# Altium PCB MosaicBus.PcbDoc
Units mm, origin at the board's own origin, x right, y up, seen from the top; angles counter-clockwise.
Board outline 35.56 x 72.52 mm, 4 copper layers (L1 (Signal), L2 (GND), L3 (GND), L4 (Signal)), stack 1.211 mm thick; 36 components, 36 nets, 372 pads, 169 vias.
Unrouted connection lines stored in the file: 1.
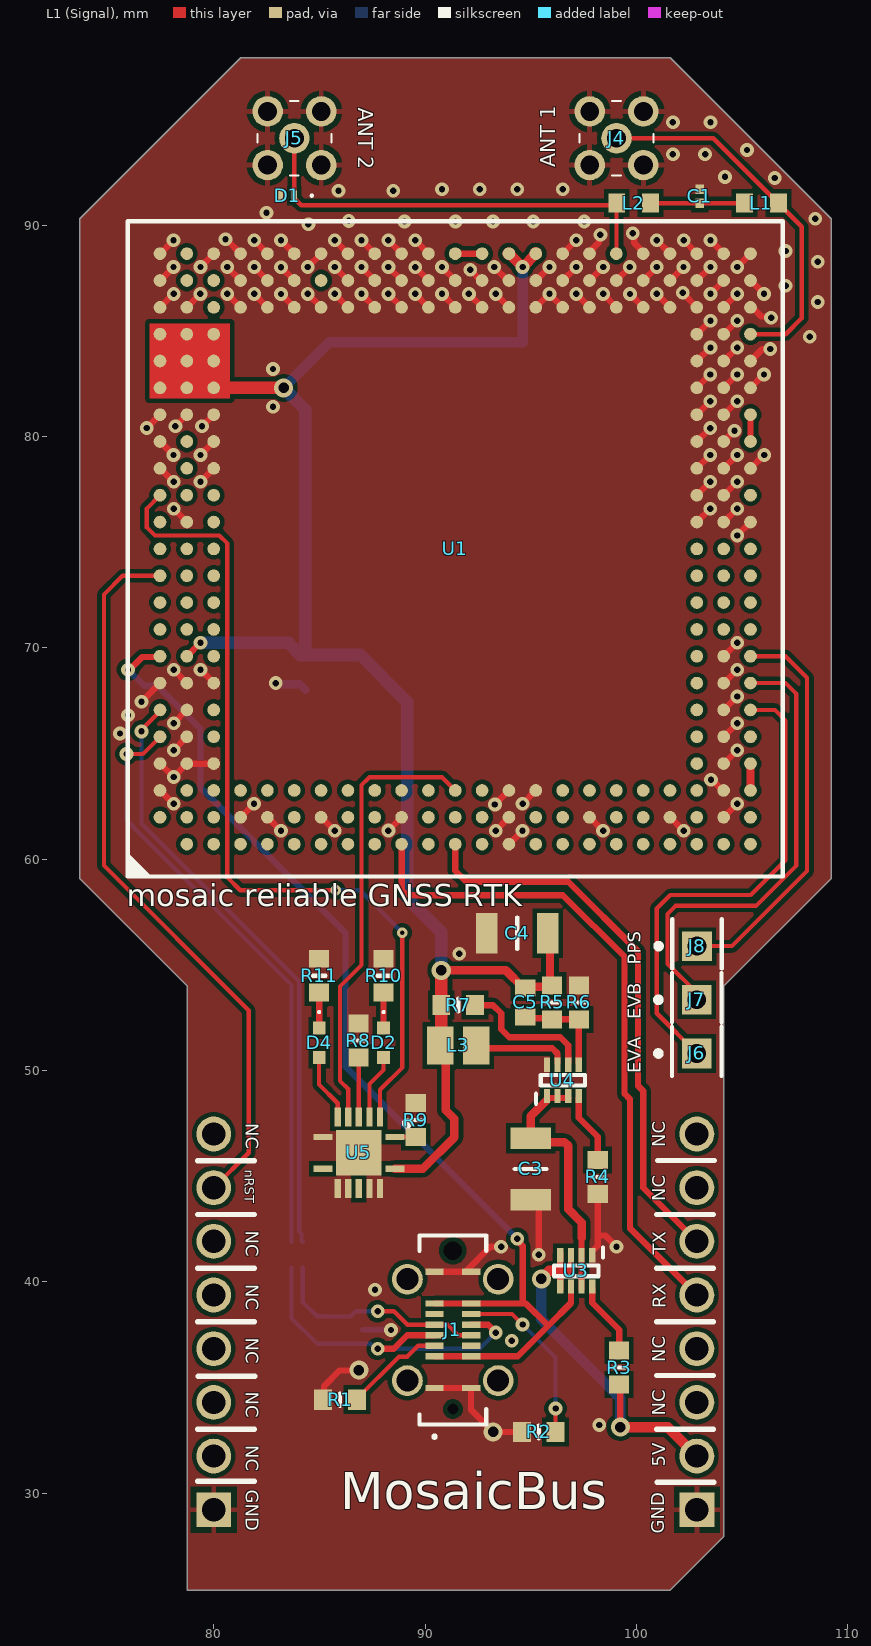
[diagram p0: L1 (Signal) view]
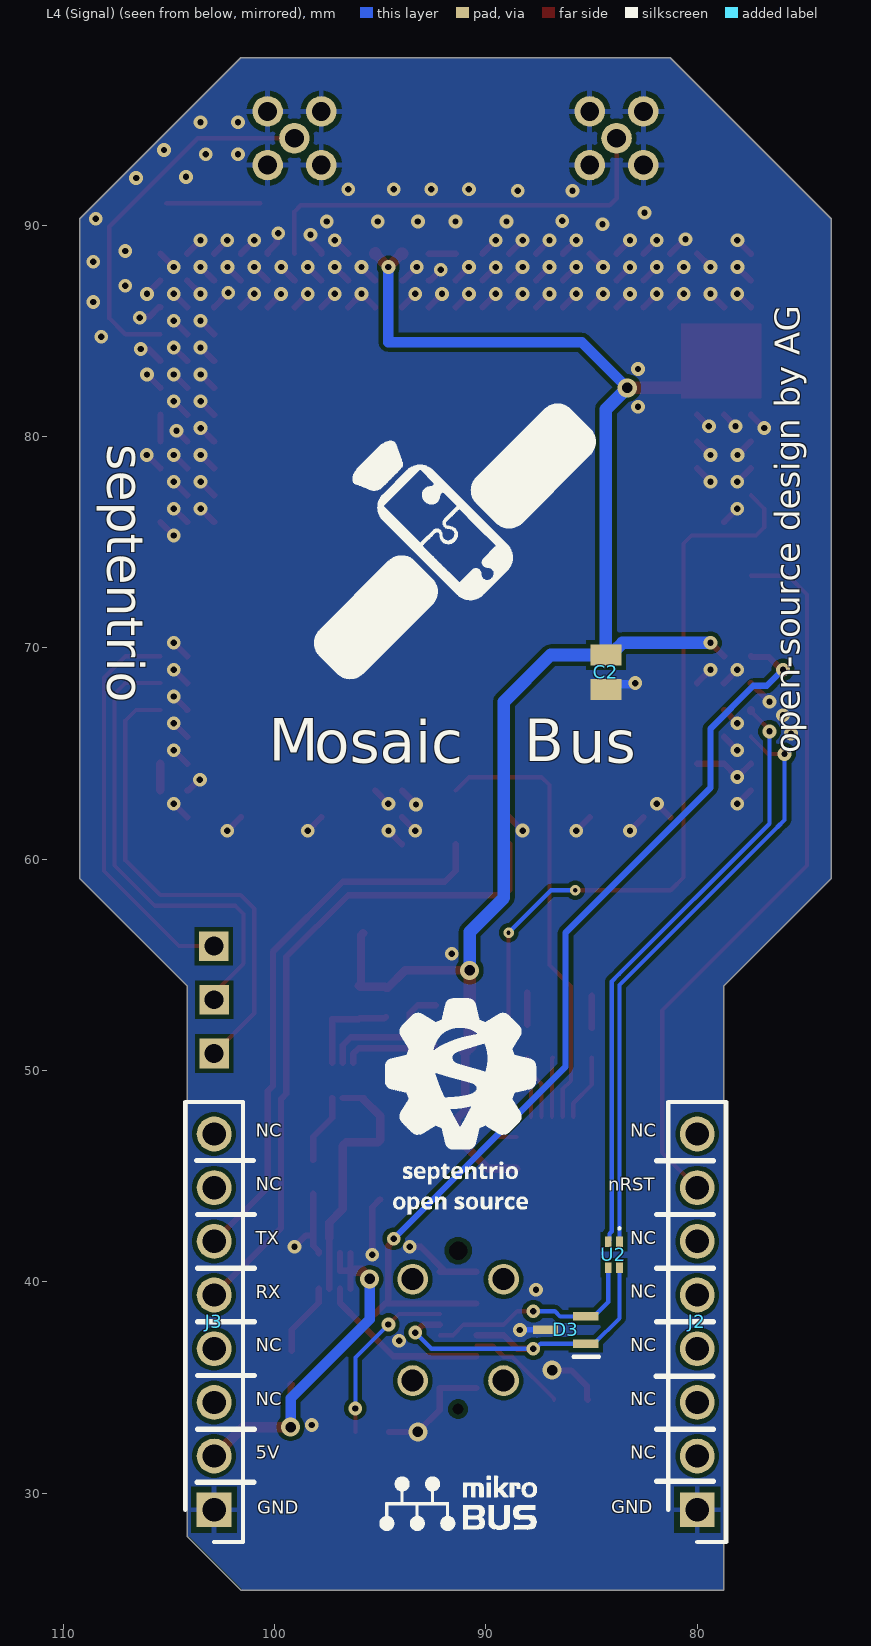
[diagram p1: L4 (Signal) view, seen from below]
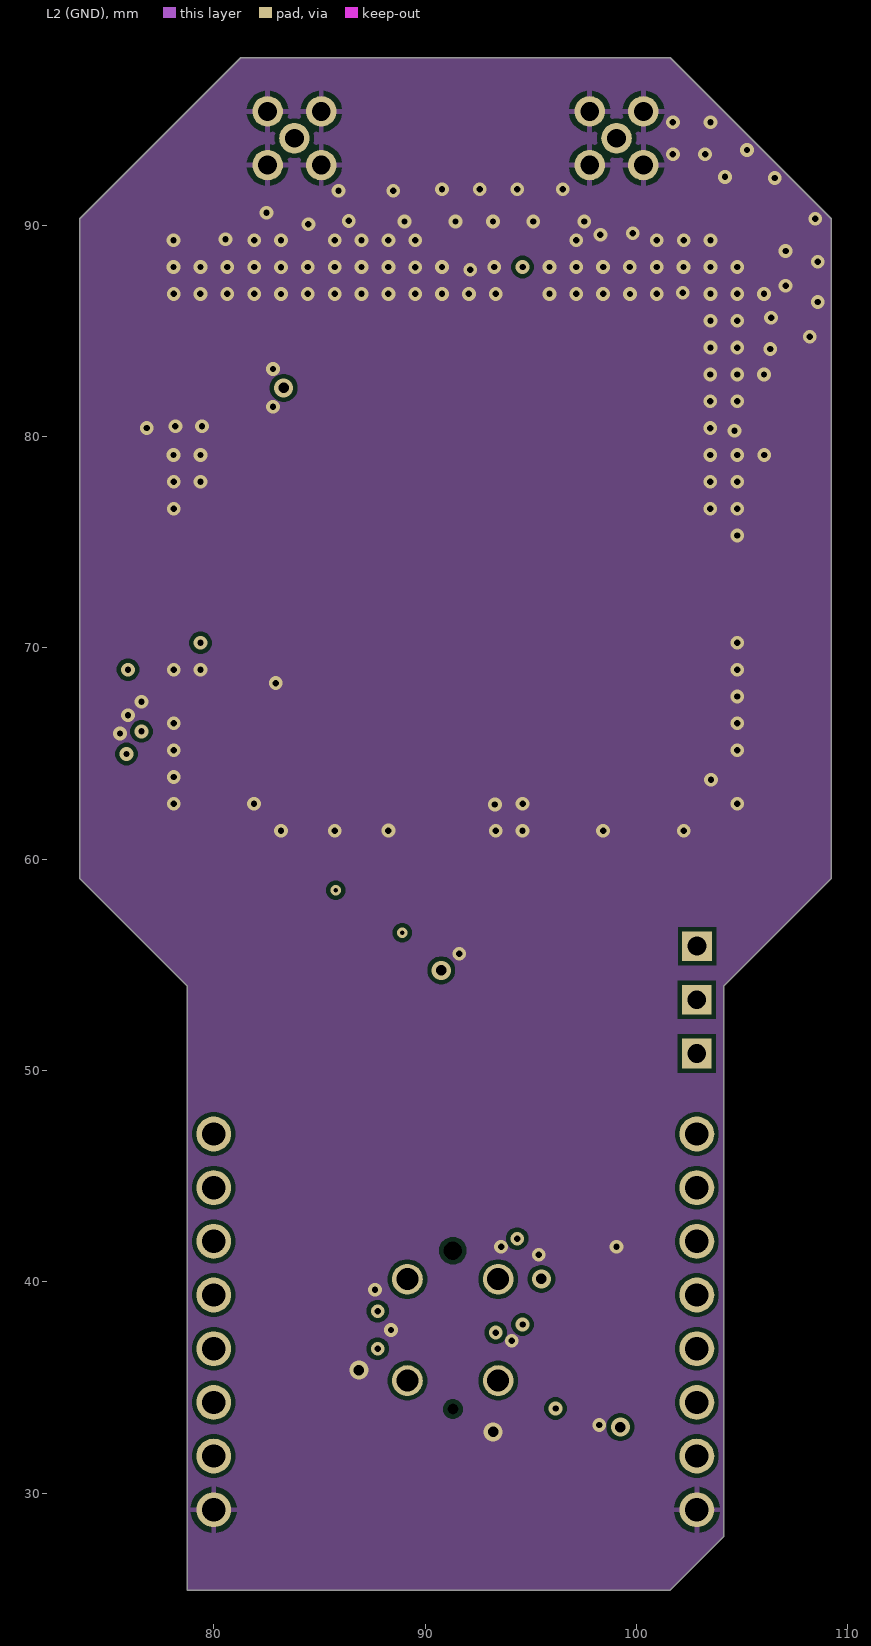
[diagram p2: L2 (GND)]
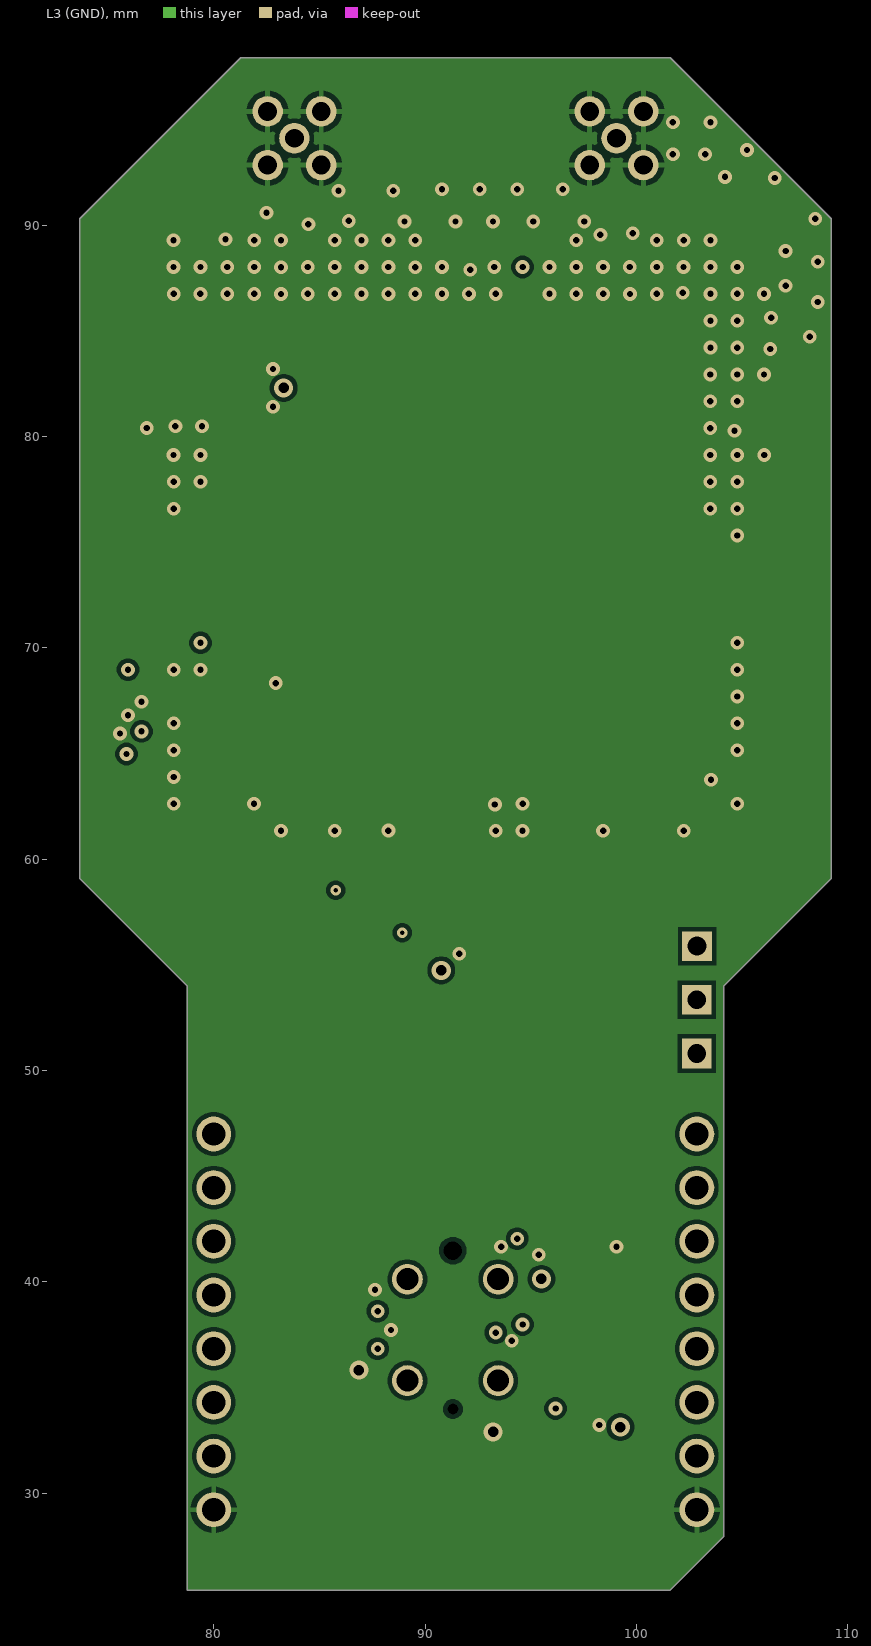
[diagram p3: L3 (GND)]
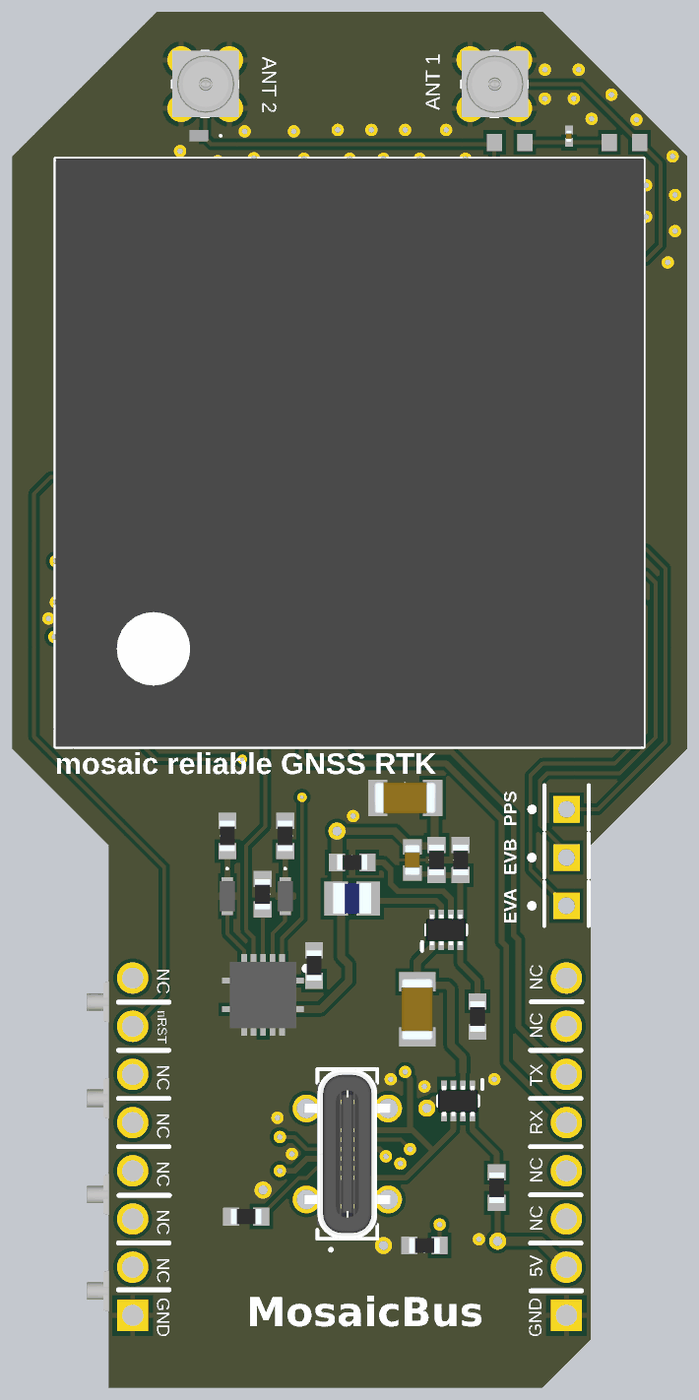
[diagram p4: 3D render of the assembled board from above, using the file's embedded part models]
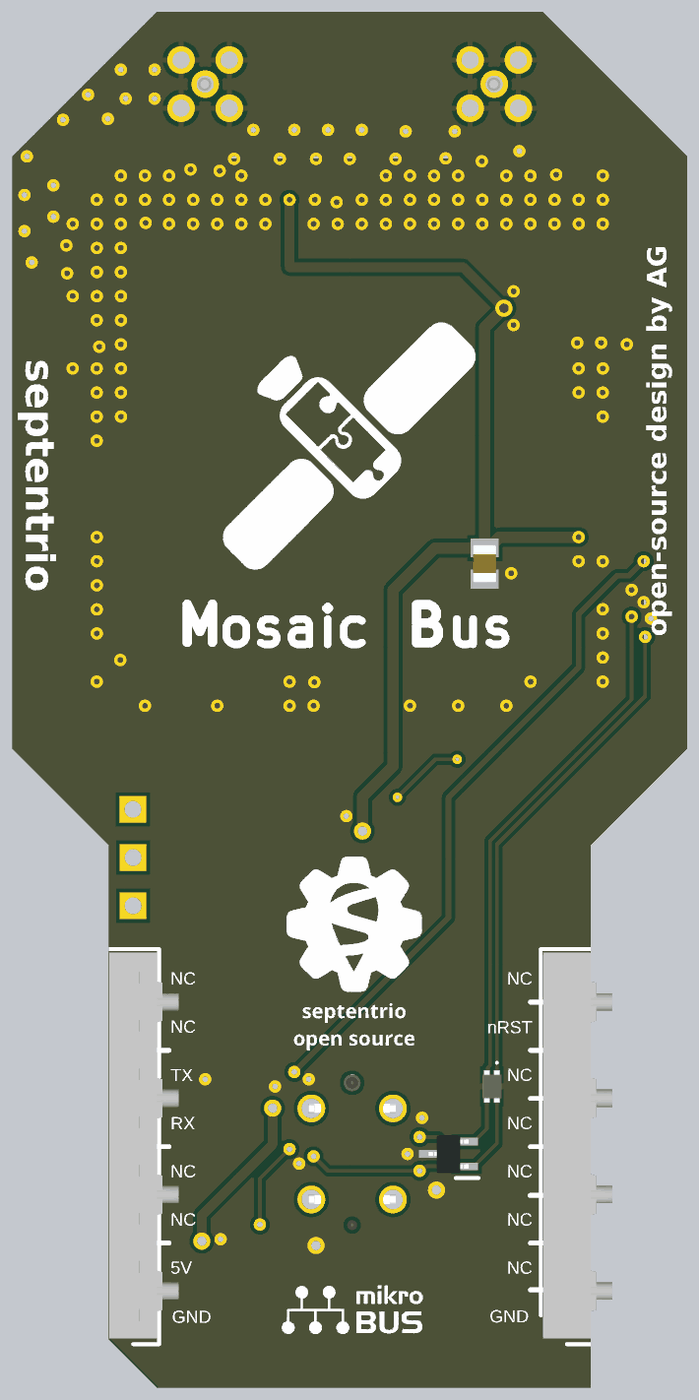
[diagram p5: 3D render of the assembled board from below, using the file's embedded part models]

## Layer stack, top to bottom
Top Solder: solder mask 0.0254, SM-001, Dk 4
L1 (Signal): signal copper 0.035
Dielectric 1: prepreg 0.18, PP-017, Dk 4.3
L2 (GND): signal copper 0.035
Dielectric 3: core 0.7112, Core-039, Dk 4.8
L3 (GND): signal copper 0.035
Dielectric 5: prepreg 0.18, PP-017, Dk 4.3
L4 (Signal): signal copper 0.035
Bottom Solder: solder mask 0.0254, SM-001, Dk 4

## Board outline
78.74,25.4 78.74,54 73.66,59.08 73.66,90.297 81.28,97.917 101.6,97.917 109.22,90.297 109.22,59.08 104.14,54 104.14,27.94 104.13,27.94 101.59,25.4

## Design rules (kind name [scope] priority, off if disabled: settings)
Clearance [All] p1: gap=0.2 ignorepadtopadclearanceinfootprint=TRUE except(0.15: Arc-Arc Arc-Track Track-Track)
ComponentClearance [All] p1 off: gap=0.254 collisioncheckmode=3 verticalgap=0.254 showdistances=TRUE donotcheckwithout3dbody=TRUE checkcomponentboundary=TRUE
DiffPairsRouting [All] p1: maxlimit=0.4 minlimit=0.2 mostfreqgap=0.3 toplayer_minwidth=0.2 toplayer_maxwidth=0.4 toplayer_prefwidth=0.3 midlayer1_minwidth=0.2 midlayer1_maxwidth=0.4 midlayer1_prefwidth=0.3 midlayer2_minwidth=0.2 midlayer2_maxwidth=0.4 midlayer2_prefwidth=0.3 bottomlayer_minwidth=0.2 bottomlayer_maxwidth=0.4 bottomlayer_prefwidth=0.3 maxuncoupledlength=12.7
Height [All] p1 off: minheight=0 maxheight=25.4 prefheight=2
HoleSize [All] p1: absolutevalues=TRUE maxlimit=2 minlimit=0.25 maxpercent=80.000 minpercent=20.000
HoleToHoleClearance [All] p1: gap=0.35 allowstackedmicrovias=TRUE
MinimumSolderMaskSliver [All] p1: minsoldermaskwidth=0.08
PlaneClearance [All] p1: clearance=0.3
PlaneConnect [All] p1: planeconnectstyle=Direct reliefexpansion=0.508 reliefentries=4 reliefconductorwidth=0.254 reliefairgap=0.254
PolygonConnect [All] p1: thpad.connectstyle=Relief thpad.reliefconductorwidth=0.254 thpad.reliefentries=4 thpad.polygonreliefangle="90 Angle" thpad.airgapwidth=0.254 smdpad.connectstyle=Direct smdpad.reliefconductorwidth=0.254 smdpad.reliefentries=4 smdpad.polygonreliefangle="90 Angle" smdpad.airgapwidth=0.254 via.connectstyle=Direct via.reliefconductorwidth=0.254 via.reliefentries=4 via.polygonreliefangle="90 Angle" via.airgapwidth=0.254
RoutingVias "RoutingVias <= 0.45mm" [(ObjectKind = 'Via') And (HoleDiameter <= AsMM(0.45))] p1: holewidth=0.3 width=0.65 viastyle="Through Hole" minholewidth=0.25 minwidth=0.6 maxholewidth=0.45 maxwidth=0.8
RoutingVias "RoutingVias > 0.45mm" [(ObjectKind = 'Via') And (HoleDiameter > AsMM(0.45))] p2: holewidth=0.5 width=0.85 viastyle="Through Hole" minholewidth=0.5 minwidth=0.85 maxholewidth=0.9 maxwidth=1.25
SilkToSilkClearance [All] p1: silktosilkclearance=0.2
SilkToSolderMaskClearance [IsPad] p1: minsilkscreentomaskgap=0.2 clearancetoexposedcopper=TRUE
SolderMaskExpansion [All] p1: expansion=0 istentingtop=FALSE
UnRoutedNet [All] p1: checkbadconnections=TRUE
Width [All] p1: maxlimit=1.5 minlimit=0.15 preferedwidth=0.3
Width Width_Ant [All] p2: maxlimit=0.329 minlimit=0.329 preferedwidth=0.209 impedanceprofiledriven=TRUE impedanceprofileid={CD74243C-5134-4139-B155-4422ED206F6A} impedanceprofilevalue=50.000000 minimp=50.000000 maximp=50.000000 favimp=50.000000
19 further rules are at their usual default settings.

## Classes and differential pairs
component class Mosaic-Bus: C1 C2 D1 D2 D4 J4 J5 J6 J7 J8 L1 L2 R8 R9 R10 R11 U1 U5
component class Power-Connectors: B1 B2 B3 B4 C3 C4 C5 D3 J1 J2 J3 L3 R1 R2 R3 R4 R5 R6 R7 U2 U3 U4 X1 X2 X3 X4 X5 X6 X7
differential pair USB_DEV: +USB_DEV_P -USB_DEV_N

## Components (designator, comment, footprint, x,y, rotation, side; value= is the part's Value field where it differs from the comment)
C1 "100pF" CAPC0603X35N 102.997,91.364 r270 top
C2 "22uF" CAPC2012X145N 84.328,68.834 r270 bottom
C3 "22uF" CAPC3317X190N 94.996,45.339 r90 top
C4 "22uF" CAPC3317X190N 94.361,56.49 r180 top
C5 "10pF" CAPC1608X95N 94.742,53.213 r90 top
D1 "TPD1E0B04DPYR" TPD1E0B04DPYR 83.49,91.389 r180 top
D2 "Amber" 155060AS75300 88.036,51.308 r270 top
D3 "TPD2E2U06QDCKRQ1" TPD2E2U06QDCKRQ1 86.233,37.719 r0 bottom
D4 "Amber" 155060AS75300 84.988,51.308 r270 top
J1 "USB412003C" USB412003C 91.313,37.719 r90 top
J2 "Left" HDRV8W63P0X254_1X8_2032X254X970P 80,29.21 r90 bottom locked
J3 "Right" HDRV8W63P0X254_1X8_2032X254X970P 102.86,29.21 r90 bottom locked
J4 "ANT 1" MMCX-734151472 99.06,94.107 r0 top
J5 "ANT 2" MMCX-734151472 83.82,94.107 r0 top
J6 "EVA" TECO-5-146280-2_V 102.86,52.07 r90 top
J7 "EVB" TECO-5-146280-2_V 102.86,54.61 r90 top
J8 "PPS" TECO-5-146280-2_V 102.87,57.15 r90 top
L1 "39nH" 744786139A 105.918,91.034 r0 top
L2 "39nH" 744786139A 99.873,91.034 r0 top
L3 "470nH" INDC2016X100N 91.567,51.181 r0 top
R1 "5.1k" RESC1608X60N 85.979,34.417 r180 top
R2 "5.1k" RESC1608X60N 95.377,32.893 r180 top
R3 "10k" RESC1608X60N 99.187,35.941 r270 top
R4 "10k" RESC1608X60N 98.171,44.958 r270 top
R5 "100k" RESC1608X60N 96.012,53.213 r90 top
R6 "22k" RESC1608X60N 97.282,53.213 r270 top
R7 "100k" RESC1608X60N 91.567,53.086 r180 top
R8 "10k" RESC1608X60N 86.843,51.41 r90 top
R9 "10k" RESC1608X60N 89.56,47.65 r90 top
R10 "330R" RESC1608X60N 88.036,54.483 r90 top
R11 "330R" RESC1608X60N 84.988,54.483 r270 top
U1 "mosaic reliable GNSS RTK" Mosaic-x5 91.43,74.676 r90 top
U2 "KCZ1210AH900HRTD25" KCZ1210AH900HRTD25 83.947,41.275 r0 bottom
U3 "TPS2116DRLR" SOTFL50P160X60-8N 97.155,40.513 r270 top
U4 "TPS628501DRLR" SOTFL50P160X60-8N 96.52,49.53 r90 top
U5 "SN74LVTH125RGYR" QFN50P350X350X100-15N-D 86.868,46.101 r180 top

## Footprints (in the part's own frame and the unit in brackets; to place one, negate y for a bottom-side part, rotate by r counter-clockwise, add the part's x,y. Pads: shape width x height; smd on the part's side, far side on the other; paste and mask are expansions set on the pad)
155060AS75300 [mm]
  rect 0.6x0.6 smd: 1(-0.7,0) 2(0.7,0)
  silkscreen extent -1.5,-0.05 -1.4,0.05, body extent -0.8,-0.4 0.8,0.4, height 1.28
744786139A [mm] "RF Inductor 1.4GHz"
  rect 0.8x0.9 smd: 1(0.8,0) 2(-0.8,0)
CAPC0603X35N [mm]
  rect 0.46x0.42 smd: 1(-0.33,0) 2(0.33,0)
  body extent -0.3,-0.15 0.3,0.15, height 0.35
CAPC1608X95N [mm]
  rect 0.81x0.99 smd: 1(-0.69,0) 2(0.69,0)
  body extent -0.81,-0.41 0.81,0.41, height 0.95
CAPC2012X145N [mm]
  rect 0.99x1.47 smd: 1(-0.82,0) 2(0.82,0)
  body extent -1,-0.63 1,0.63, height 0.7
CAPC3317X190N [mm]
  rect 1.02x1.92 smd: 1(-1.45,0) 2(1.45,0)
  silkscreen extent 0,-0.75 0,0.75, body extent -1.65,-0.85 1.65,0.85, height 1.9
HDRV8W63P0X254_1X8_2032X254X970P [mm]
  rect 1.65x1.65 / inner round 1.65 / far side rect 1.65x1.65 hole 1.1: 1(0,0)
  round 1.65 hole 1.1: 2(2.54,0) 3(5.08,0) 4(7.62,0) 5(10.16,0) 6(12.7,0) 7(15.24,0) 8(17.78,0)
  silkscreen extent -1.52,-1.37 19.3,1.37, body extent -1.2,-2.4 19.12,1.25, height 9.5
INDC2016X100N [mm]
  rect 1.25x1.8 smd: 1(-0.85,0) 2(0.85,0)
  body extent -1,-0.8 1,0.8, height 1
KCZ1210AH900HRTD25 [mm]
  rect 0.325x0.5 smd: 1(-0.263,-0.612) 2(0.262,-0.612) 3(0.262,0.612) 4(-0.263,0.612)
  silkscreen extent -0.31,-1.3 -0.21,-1.2, body extent -0.5,-0.83 0.5,0.83, height 0.7
MMCX-734151472 [mm] "MMCX Connector"
  round 1.446 hole 0.89: 1(0,0) 2(-1.27,1.27) 3(-1.27,-1.27) 4(1.27,-1.27) 5(1.27,1.27)
  silkscreen extent -1.76,-1.76 1.76,1.76, body extent -1.73,-1.75 1.78,1.75, height 4.42
Mosaic-x5 [mm]
  round 0.6 smd: A2(-12.7,13.97) A3(-11.43,13.97) A4(-10.16,13.97) A5(-8.89,13.97) A6(-7.62,13.97) A7(-6.35,13.97) A8(-5.08,13.97) A9(-3.81,13.97) A10(-2.54,13.97) A11(-1.27,13.97) A12(0,13.97) A13(1.27,13.97) A14(2.54,13.97) A15(3.81,13.97) A16(5.08,13.97) A17(6.35,13.97) A18(7.62,13.97) A19(8.89,13.97) A20(10.16,13.97) A21(11.43,13.97) A22(12.7,13.97) A23(13.97,13.97) AA1(-13.97,-11.43) AA2(-12.7,-11.43) AA3(-11.43,-11.43) AA4(-10.16,-11.43) AA5(-8.89,-11.43) AA6(-7.62,-11.43) AA7(-6.35,-11.43) AA8(-5.08,-11.43) AA9(-3.81,-11.43) AA10(-2.54,-11.43) AA11(-1.27,-11.43) AA12(0,-11.43) AA13(1.27,-11.43) AA14(2.54,-11.43) AA15(3.81,-11.43) AA16(5.08,-11.43) AA17(6.35,-11.43) AA18(7.62,-11.43) AA19(8.89,-11.43) AA20(10.16,-11.43) AA21(11.43,-11.43) AA22(12.7,-11.43) AA23(13.97,-11.43) AB1(-13.97,-12.7) AB2(-12.7,-12.7) AB3(-11.43,-12.7) AB4(-10.16,-12.7) AB5(-8.89,-12.7) AB6(-7.62,-12.7) AB7(-6.35,-12.7) AB8(-5.08,-12.7) AB9(-3.81,-12.7) AB10(-2.54,-12.7) AB11(-1.27,-12.7) AB12(0,-12.7) AB13(1.27,-12.7) AB14(2.54,-12.7) AB15(3.81,-12.7) AB16(5.08,-12.7) AB17(6.35,-12.7) AB18(7.62,-12.7) AB19(8.89,-12.7) AB20(10.16,-12.7) AB21(11.43,-12.7) AB22(12.7,-12.7) AB23(13.97,-12.7) AC1(-13.97,-13.97) AC2(-12.7,-13.97) AC3(-11.43,-13.97) AC4(-10.16,-13.97) AC5(-8.89,-13.97) AC6(-7.62,-13.97) AC7(-6.35,-13.97) AC8(-5.08,-13.97) AC9(-3.81,-13.97) AC10(-2.54,-13.97) AC11(-1.27,-13.97) AC12(0,-13.97) AC13(1.27,-13.97) AC14(2.54,-13.97) AC15(3.81,-13.97) AC16(5.08,-13.97) AC17(6.35,-13.97) AC18(7.62,-13.97) AC19(8.89,-13.97) AC20(10.16,-13.97) AC21(11.43,-13.97) AC22(12.7,-13.97) AC23(13.97,-13.97) B1(-13.97,12.7) B2(-12.7,12.7) B3(-11.43,12.7) B4(-10.16,12.7) B5(-8.89,12.7) B6(-7.62,12.7) B7(-6.35,12.7) B8(-5.08,12.7) B9(-3.81,12.7) B10(-2.54,12.7) B11(-1.27,12.7) B12(0,12.7) B13(1.27,12.7) B14(2.54,12.7) B15(3.81,12.7) B16(5.08,12.7) B17(6.35,12.7) B18(7.62,12.7) B19(8.89,12.7) B20(10.16,12.7) B21(11.43,12.7) B22(12.7,12.7) B23(13.97,12.7) C1(-13.97,11.43) C2(-12.7,11.43) C3(-11.43,11.43) C4(-10.16,11.43) C5(-8.89,11.43) C6(-7.62,11.43) C7(-6.35,11.43) C8(-5.08,11.43) C9(-3.81,11.43) C10(-2.54,11.43) C11(-1.27,11.43) C12(0,11.43) C13(1.27,11.43) C14(2.54,11.43) C15(3.81,11.43) C16(5.08,11.43) C17(6.35,11.43) C18(7.62,11.43) C19(8.89,11.43) C20(10.16,11.43) C21(11.43,11.43) C22(12.7,11.43) C23(13.97,11.43) D1(-13.97,10.16) D2(-12.7,10.16) D3(-11.43,10.16) D21(11.43,10.16) D22(12.7,10.16) D23(13.97,10.16) E1(-13.97,8.89) E2(-12.7,8.89) E3(-11.43,8.89) E21(11.43,8.89) E22(12.7,8.89) E23(13.97,8.89) F1(-13.97,7.62) F2(-12.7,7.62) F3(-11.43,7.62) F21(11.43,7.62) F22(12.7,7.62) F23(13.97,7.62) G1(-13.97,6.35) G2(-12.7,6.35) G3(-11.43,6.35) G21(11.43,6.35) G22(12.7,6.35) G23(13.97,6.35) H1(-13.97,5.08) H2(-12.7,5.08) H3(-11.43,5.08) H21(11.43,5.08) H22(12.7,5.08) H23(13.97,5.08) J1(-13.97,3.81) J2(-12.7,3.81) J3(-11.43,3.81) J21(11.43,3.81) J22(12.7,3.81) J23(13.97,3.81) K1(-13.97,2.54) K2(-12.7,2.54) K3(-11.43,2.54) K21(11.43,2.54) K22(12.7,2.54) K23(13.97,2.54) L1(-13.97,1.27) L2(-12.7,1.27) L3(-11.43,1.27) L21(11.43,1.27) L22(12.7,1.27) L23(13.97,1.27) M1(-13.97,0) M2(-12.7,0) M3(-11.43,0) M21(11.43,0) M22(12.7,0) M23(13.97,0) N1(-13.97,-1.27) N2(-12.7,-1.27) N3(-11.43,-1.27) N21(11.43,-1.27) N22(12.7,-1.27) N23(13.97,-1.27) P1(-13.97,-2.54) P2(-12.7,-2.54) P3(-11.43,-2.54) P21(11.43,-2.54) P22(12.7,-2.54) P23(13.97,-2.54) R1(-13.97,-3.81) R2(-12.7,-3.81) R3(-11.43,-3.81) R21(11.43,-3.81) R22(12.7,-3.81) R23(13.97,-3.81) T1(-13.97,-5.08) T2(-12.7,-5.08) T3(-11.43,-5.08) T21(11.43,-5.08) T22(12.7,-5.08) T23(13.97,-5.08) U1(-13.97,-6.35) U2(-12.7,-6.35) U3(-11.43,-6.35) U21(11.43,-6.35) U22(12.7,-6.35) U23(13.97,-6.35) V1(-13.97,-7.62) V2(-12.7,-7.62) V3(-11.43,-7.62) V21(11.43,-7.62) V22(12.7,-7.62) V23(13.97,-7.62) W1(-13.97,-8.89) W2(-12.7,-8.89) W3(-11.43,-8.89) W21(11.43,-8.89) W22(12.7,-8.89) W23(13.97,-8.89) Y1(-13.97,-10.16) Y2(-12.7,-10.16) Y3(-11.43,-10.16) Y21(11.43,-10.16) Y22(12.7,-10.16) Y23(13.97,-10.16)
  silkscreen extent -15.5,-15.5 15.5,15.5, body extent -15.5,-15.5 15.5,15.5, height 4.5
QFN50P350X350X100-15N-D [mm]
  rect 0.9x0.3 smd: 1(-1.7,-0.75) 7(1.7,-0.75) 8(1.7,0.75) 14(-1.7,0.75)
  rect 0.3x0.9 smd: 2(-1,-1.7) 3(-0.5,-1.7) 4(0,-1.7) 5(0.5,-1.7) 6(1,-1.7) 9(1,1.7) 10(0.5,1.7) 11(0,1.7) 12(-0.5,1.7) 13(-1,1.7)
  rect 2.15x2.15 smd: 15(0,0)
  silkscreen extent -2.41,-1.52 -2.16,-1.27, body extent -1.75,-1.75 1.75,1.75, height 0.97
RESC1608X60N [mm]
  rect 0.85x0.95 smd: 1(-0.8,0) 2(0.8,0)
  silkscreen extent 0,-0.3 0,0.3, body extent -0.8,-0.4 0.8,0.4, height 0.6
SOTFL50P160X60-8N [mm]
  rect 0.67x0.3 smd: 1(-0.74,0.75) 2(-0.74,0.25) 3(-0.74,-0.25) 4(-0.74,-0.75) 5(0.74,-0.75) 6(0.74,-0.25) 7(0.74,0.25) 8(0.74,0.75)
  silkscreen extent -1.11,-1.05 0.25,1.27, body extent -0.8,-1.05 0.8,1.05, height 0.6
TECO-5-146280-2_V [mm] "Connector, 2-Leads, Body 4.67x2.34mm, Pitch 2.54mm"
  rect 1.4x1.4 hole 0.89: 1(-1.27,0)
  silkscreen extent -2.33,-1.17 0,1.94
TPD1E0B04DPYR [mm] "TVS Diode Bidirectional 1-Channel"
  rect 0.25x0.5 smd: 1(-0.325,0) 2(0.325,0)
  silkscreen extent -1.2,-0.05 -1.1,0.05, body extent -0.5,-0.3 0.5,0.3, height 0.45
TPD2E2U06QDCKRQ1 [mm] "TVS Diode Unidirectional 2-Channel"
  rect 1.2x0.4 smd: 1(-0.95,0.65) 2(-0.95,-0.65) 3(0.95,0)
  silkscreen extent -1.58,1.27 -0.38,1.27, body extent -1.05,-1 1.05,1, height 1
USB412003C [mm] "USB-C Connector 16P Vertical"
  rect 0.3x0.87 smd: A1(-2.75,0.865) A4(-1.25,0.865) A5(-0.75,0.865) A6(-0.25,0.865) A7(0.25,0.865) A8(0.75,0.865) A9(1.25,0.865) A12(2.75,0.865) B1(2.75,-0.865) B4(1.25,-0.865) B5(0.75,-0.865) B6(0.25,-0.865) B7(-0.25,-0.865) B8(-0.75,-0.865) B9(-1.25,-0.865) B12(-2.75,-0.865)
  round 1.46 hole 1.04: MH1(-2.4,2.15) MH2(2.4,2.15) MH3(2.4,-2.15) MH4(-2.4,-2.15)
  round 0.26 hole 0.52 unplated: MH5(-3.75,0)
  round 0.445 hole 0.89 unplated: MH6(3.75,0)
  silkscreen extent -5.1,-1.58 4.47,1.58, body extent -4.47,-2.3 4.47,2.3, height 6.5

## Part data
C1: library part CMP-013-000003-3, "100pF Capacitor", Dielectric=C0G, Manufacturer=Walsin, Tolerance=5%, VoltageRating=25V, Capacitance=100pF, SIZE=0603
C2: library part CMP-013-000005-3, "22uF Capacitor", Capacitance=22µF, Dielectric=X5R, Manufacturer=Walsin, Tolerance=10%, VoltageRating=6.3V, SIZE=2012
C3 C4: library part CMP-00015-2, "22uF Capacitor", Capacitance=22µF, Dielectric=X5R, Manufacturer=Walsin, Tolerance=10%, VoltageRating=16V, SIZE=3216
C5: library part CMP-00005-3, "10pF Capacitor", Dielectric=C0G, Manufacturer=Walsin, Tolerance=1%, VoltageRating=100V, Capacitance=10pF, SIZE=1608
D1: library part CMP-019-000007-3, "TVS Diode Bidirectional 1-Channel", Manufacturer="Texas Instruments", Type="TVS Diode"
D2 D4: library part CMP-00011-4, "Amber LED", ForwardCurrent=2A, ForwardVoltage=20mV, Manufacturer="Wurth Elektronik", Color=Amber, SIZE=1608
D3: library part CMP-019-000005-5, "TVS Diode Unidirectional 2-Channel", Manufacturer="Texas Instruments", Type="TVS Diode"
J1: library part CMP-002-000001-6, "USB-C Connector 16P Vertical", Manufacturer="Global Connector Technology", Type=USB
J2 J3: library part CMP-007-000003-3, "Headers & Wire Housings 8P SINGLE ROW"
J4 J5: library part CMP-007-000002-4, "MMCX Connector", Manufacturer=Molex
J6 J7 J8: library part CMP-00010-1, "Through hole pin"
L1 L2: library part CMP-00001-4, "39nH Inductor", Frequency=1.4GHz, Manufacturer="Wurth Elektronik", Tolerance=5%, Inductance=39nH, Shielding=Shielded, SIZE=1608
L3: library part CMP-00006-6, "470nH Inductor", Frequency=175MHz, Manufacturer="Wurth Elektronik", Tolerance=30%, Inductance=470nH, Shielding=Shielded, SIZE=2016
R1 R2: library part CMP-052-000000-4, "5.1kOhm Resistor", Manufacturer=Walsin, PowerRating=100mW, Tolerance=1%, VoltageRating=50V, Resistance=5.1k, SIZE=1608
R3 R4 R8 R9: library part CMP-052-000001-5, "10kOhm Resistor", Manufacturer=Walsin, PowerRating=100mW, Tolerance=5%, VoltageRating=50V, Resistance=10k, SIZE=1608
R5 R7: library part CMP-00007-4, "100kOhm Resistor", Manufacturer=Walsin, PowerRating=100mW, Tolerance=5%, VoltageRating=50V, Resistance=100k, SIZE=1608
R6: library part CMP-00008-4, "22kOhm Resistor", Manufacturer=Walsin, PowerRating=100mW, Tolerance=5%, VoltageRating=50V, Resistance=22k, SIZE=1608
R10 R11: library part CMP-00017-2, "330Ohm Resistor", Manufacturer=Walsin, PowerRating=100mW, Resistance=330, Tolerance=5%, VoltageRating=50V, SIZE=1608
U1: library part CP-Mosaic-x5-7, "Septentrio Mosaic x5"
U2: library part CMP-016-000001-3, "Common Mode Filters / Chokes,"
U3: library part CMP-00007-4, "Power Multiplexer", Case=SOT-5X3-8, Manufacturer="Texas Instruments", Type="Power Multiplexer"
U4: library part CMP-00008-4, "Switching Voltage Regulators", Case=SOT-583-8, Manufacturer="Texas Instruments", Topology=Buck, Type="Switching Voltage Regulator"
U5: library part CMP-00009-5, "3-State Output Driver", Case=VQFN-14, Manufacturer="Texas Instruments", Output Current=64mA, Supply Voltage=3.3V, Inputs=4, Outputs=3

## Via types
v1: diameter 0.65, hole 0.3, L1 (Signal) to L4 (Signal), 161 vias
v2: diameter 0.9, hole 0.5, L1 (Signal) to L4 (Signal), 6 vias
v3: diameter 0.5, hole 0.2, L1 (Signal) to L4 (Signal), 2 vias

## Nets (pads, with @x,y where several pads share a name; then routed paths per layer and width w, separated by ;. In a path a pad name is that pad's centre, name@x,y a point inside that pad or via, vN(x,y) a via of type N, cw(c..) or ccw(c..) an arc to the next point about the centre after c; other vN are vias at no path point)
1V8: U1.AC3 U1.AC4 | length 1.3
  L1 (Signal) w0.4: U1.AC3 U1.AC4
3.3V: C2.1 C4.1 C5.2 L3.1 R5.2 R7.2 U1.A18 U1.A19 U1.A20 U1.B8 U1.B18 U1.B19 U1.B20 U1.C18 U1.C19 U1.C20 U1.P23 U1.R23 U5.14 | length 78.5
  L1 (Signal) w0.3: U1.B8 78.735,69.596 79.37,70.231 v1(79.375,70.231)
  L1 (Signal) w0.4: U5.14 89.903,45.351 91.389,46.838 91.389,47.703 90.983,48.109 L3.1@90.983,50.915 ; v2(90.767,54.737) 93.818,54.737 94.652,53.903 C5.2 94.797,53.958 95.957,53.958 R5.2 95.911,54.114 95.911,56.389 C4.1
  L1 (Signal) w0.5: U1.P23@93.98,88.646 v1(94.615,88.011) U1.R23@95.24,88.636
  L1 (Signal) w0.6: 80.518,82.296 v2(83.312,82.296) ; v2(90.767,54.737) R7.2 90.767,51.231 L3.1 L3.1@90.983,50.915 ; U1.P23 U1.P23@93.98,88.646 ; U1.R23@95.24,88.636 U1.R23 U1.R23@95.24,88.656
  L4 (Signal) w0.5: v2(83.312,82.296) 85.471,84.455 94.615,84.455 v1(94.615,88.011)
  L4 (Signal) w0.6: v1(79.375,70.231) 83.542,70.231 83.893,69.88 83.893,69.849 84.088,69.654 C2.1 ; v2(83.312,82.296) 84.328,81.28 C2.1 ; v2(90.767,54.737) 90.767,56.553 89.154,58.166 89.154,67.437 86.937,69.654 C2.1
5V_IN: J3.2 R3.2 U3.3 U3.4 U3.5 | length 18.8
  L1 (Signal) w0.3: U3.5@96.405,39.675 96.405,40.513 ; U3.4@96.405,41.351 96.405,40.513 ; U3.3@96.905,41.351 96.905,40.664 96.901,40.659 96.901,40.513 96.405,40.513 ; R3.2 R3.2@99.237,35.141 ; v2(99.238,33.122) R3.2@99.238,35.04
  L1 (Signal) w0.5: v2(95.504,40.132) 95.885,40.513 96.405,40.513 ; v2(99.238,33.122) 101.488,33.122 J3.2
  L4 (Signal) w0.5: v2(95.504,40.132) 95.504,38.227 99.238,34.493 v2(99.238,33.122)
5V_OUT: C3.2 U3.2 U3.7 U4.1 U4.2 U4.3 | length 12.2
  L1 (Signal) w0.3: U4.1@95.77,48.605 95.77,48.692 96.27,48.692 U4.3@96.77,48.692 ; U3.7@97.405,39.675 97.405,41.351 97.405,42.084
  L1 (Signal) w0.4: U4.1@95.77,48.605 94.996,47.831 94.996,46.709 95.096,46.609 96.598,46.609 96.774,46.433 96.774,43.434 97.405,42.803 97.405,42.084
GND: C1.1 C2.2 C3.1 C4.2 D1.2 D3.3 J1.A1 J1.A12 J1.B1 J1.B12 J2.1 J3.1 J4.2 J4.3 J4.4 J4.5 J5.2 J5.3 J5.4 J5.5 R1.2 R2.2 R4.2 R6.1 R8.2 R9.2 R10.2 R11.1 U1.A3 U1.A4 U1.A7 U1.A15 U1.A16 U1.A17 U1.A21 U1.A22 U1.A23 U1.AA13 U1.AA14 U1.AA15 U1.AA16 U1.AA17 U1.AA18 U1.AA19 U1.AA20 U1.AA21 U1.AA22 U1.AA23 U1.AB2 U1.AB3 U1.AB4 U1.AB5 U1.AB6 U1.AB7 U1.AB8 U1.AB13 U1.AB14 U1.AB15 U1.AB16 U1.AB17 U1.AB18 U1.AB19 U1.AB20 U1.AB21 U1.AB22 U1.AB23 U1.AC13 U1.AC15 U1.AC18 U1.AC19 U1.AC21 U1.AC22 U1.AC23 U1.B4 U1.B5 U1.B6 U1.B7 U1.B13 U1.B17 U1.B21 U1.C4 U1.C7 U1.C15 U1.C16 U1.C17 U1.C23 U1.D2 U1.D21 U1.D22 U1.D23 U1.E2 U1.E21 U1.E22 U1.E23 U1.F21 U1.F22 U1.F23 U1.G2 U1.G21 U1.G23 U1.H21 U1.H22 U1.H23 U1.J21 U1.J22 U1.J23 U1.K2 U1.K21 U1.K22 U1.K23 U1.L21 U1.L22 U1.L23 U1.M21 U1.M22 U1.N21 U1.N22 U1.P1 U1.P2 U1.P3 U1.P21 U1.P22 U1.R3 U1.R21 U1.R22 U1.T21 U1.T22 U1.T23 U1.U2 U1.U21 U1.U22 U1.U23 U1.V21 U1.V22 U1.W21 U1.W22 U1.W23 U1.Y2 U1.Y21 U1.Y22 U1.Y23 U3.1 U4.8 U5.7 U5.9 U5.10 U5.12 U5.13 U5.15 | length 124.7
  L1 (Signal) w0.2: U1.A15 U1.A15@77.47,78.486 ; U1.B17@78.73,81.016 U1.B17 ; U1.C15 U1.C15@80,78.496 ; U1.C16@80,79.746 U1.C16
  L1 (Signal) w0.3: v1@76.581,67.437 v1(76.581,67.447) U1.A7 U1.A7@77.47,68.326 ; v1@76.835,80.391 v1(76.835,80.396) 77.46,81.021 U1.A17 ; U1.A3 77.465,63.246 78.1,62.611 v1(78.105,62.611) ; U1.A4 77.47,64.516 v1(78.105,63.881) 78.73,64.506 U1.B4 U1.C4 ; U1.A16 v1(78.095,79.121) ; U1.A21 77.465,86.106 78.1,86.741 v1(78.105,86.741) ; U1.A22 77.465,87.376 v1(78.1,88.011) v1@78.105,88.011 ; U1.A23 77.465,88.646 v1(78.1,89.281) v1@78.105,89.281 ; U1.A15@77.47,78.486 77.47,78.481 78.1,77.851 v1(78.105,77.851) ; v1(78.105,65.151) 78.73,65.776 U1.B5 ; v1@78.105,66.421 v1(78.105,66.431) U1.B6 ; v1@78.105,68.961 v1(78.105,68.956) 78.73,68.331 U1.B7 U1.B7@78.74,68.326 ; v1(78.105,76.581) 78.73,75.956 U1.B13 ; v1(78.188,80.474) U1.B17@78.73,81.016 ; U1.B21 78.735,86.106 v1(79.37,86.741) v1@79.375,86.741 ; v1(79.375,68.961) 80,68.336 U1.C7 ; v1@79.375,77.851 v1(79.375,77.856) 80,78.481 U1.C15 ; v1(79.375,79.121) U1.C16@80,79.746 ; v1(79.375,88.011) 79.375,88.016 80,88.641 U1.C23 ; v1(79.448,80.474) U1.C17 ; v1(80.645,86.741) 80.645,86.736 81.27,86.111 U1.D21 ; v1(80.645,88.011) 80.645,88.006 81.27,87.381 U1.D22 ; v1@80.645,89.281 80.645,89.276 81.27,88.651 U1.D23 ; U1.D2 81.275,61.976 v1(81.91,62.611) v1@81.915,62.611 ; v1(81.915,86.741) 81.915,86.736 82.54,86.111 U1.E21 ; v1(81.915,88.011) 81.915,88.006 82.54,87.381 U1.E22 ; v1@81.915,89.281 v1(81.915,89.276) 82.54,88.651 U1.E23 ; U1.E2 82.545,61.976 83.18,61.341 v1(83.185,61.341) ; v1@83.185,86.741 v1(83.185,86.736) 83.81,86.111 U1.F21 ; v1@83.185,88.011 v1(83.185,88.006) 83.81,87.381 U1.F22 ; v1@83.185,89.281 v1(83.185,89.276) 83.81,88.651 U1.F23 ; v1(84.455,86.741) 84.455,86.736 85.08,86.111 U1.G21 ; v1@84.455,88.011 84.455,88.016 85.08,88.641 U1.G23 ; U1.G2 85.085,61.976 v1@85.72,61.341 ; R1.2 85.217,34.455 85.217,35.052 85.968,35.803 86.857,35.803 v2(86.868,35.814) ; v1(85.725,86.741) 85.725,86.736 86.35,86.111 U1.H21 ; v1(85.725,88.011) 85.725,88.006 86.35,87.381 U1.H22 ; v1(85.725,89.281) 85.725,89.276 86.35,88.651 U1.H23 ; v1(86.995,86.741) 86.995,86.736 87.62,86.111 U1.J21 ; v1(86.995,88.011) 86.995,88.006 87.62,87.381 U1.J22 ; v1@86.995,89.281 v1(86.995,89.276) 87.62,88.651 U1.J23 ; v1@88.265,61.341 v1(88.265,61.346) 88.89,61.971 U1.K2 ; v1(88.265,86.741) 88.265,86.736 88.89,86.111 U1.K21 ; v1(88.265,88.011) 88.265,88.006 88.89,87.381 U1.K22 ; v1(88.265,89.281) 88.265,89.276 88.89,88.651 U1.K23 ; v1(89.535,86.741) 89.535,86.736 90.16,86.111 U1.L21 ; v1@89.535,88.011 v1(89.535,88.006) 90.16,87.381 U1.L22 ; v1(89.535,89.281) 89.535,89.276 90.16,88.651 U1.L23 ; J1.A1 J1.B12 92.178,33.933 v2(93.218,32.893) R2.2 ; J1.A12 J1.B1 ; v1(90.805,86.741) 90.805,86.736 91.43,86.111 U1.M21 ; v1(90.805,88.011) 90.805,88.006 91.43,87.381 U1.M22 ; J1.B1@91.962,40.527 93.091,41.656 v1(93.599,41.656) ; v1(92.075,86.741) 92.075,86.736 92.7,86.111 U1.N21 ; v1(92.134,87.884) 92.642,87.376 U1.N22 ; v1(93.277,88.011) 93.912,87.376 U1.P22 ; v1(93.305,62.584) 93.307,62.584 93.968,63.246 U1.P3 ; v1(93.345,61.341) 93.345,61.346 93.97,61.971 U1.P2 ; v1(93.345,86.741) 93.345,86.736 93.97,86.111 U1.P21 ; U1.P1 93.975,60.706 v1(94.61,61.341) ; v1(94.615,62.611) 94.615,62.616 95.24,63.241 U1.R3 ; C3.1 95.017,43.889 95.377,43.529 v1(95.377,41.275) ; U1.R21 95.245,86.106 95.88,86.741 v1(95.885,86.741) ; U1.R22 95.25,87.376 v1(95.885,88.011) ; v1@95.885,86.736 96.51,86.111 U1.T21 ; U1.T22 96.515,87.376 97.15,88.011 v1(97.155,88.011) ; U1.T23 96.515,88.646 97.15,89.281 v1(97.155,89.281) ; v1(97.155,86.741) 97.155,86.736 97.78,86.111 U1.U21 ; U1.U2 97.785,61.976 98.42,61.341 v1(98.425,61.341) ; U1.U22 97.785,87.376 98.42,88.011 v1(98.425,88.011) ; U1.U23 97.78,88.727 98.231,89.178 98.231,89.468 v1(98.298,89.535) ; U3.1@97.905,41.351 97.905,41.438 98.171,41.704 98.171,42.188 ; R4.2 98.171,42.188 ; v1(98.425,86.741) 98.425,86.736 99.05,86.111 U1.V21 ; U1.V22 99.055,87.376 v1(99.69,88.011) v1@99.695,88.011 ; v1(99.06,41.656) 98.528,42.188 98.171,42.188 ; v1@99.695,86.741 99.695,86.736 100.32,86.111 U1.W21 ; v1(99.832,89.611) 99.899,89.544 99.899,89.149 100.32,88.727 U1.W23 ; U1.W22 100.325,87.376 100.96,88.011 v1(100.965,88.011) ; v1(100.965,86.741) 100.965,86.736 101.59,86.111 U1.Y21 U1.Y21@101.595,86.106 ; v1(100.965,89.281) 100.965,89.276 101.59,88.651 U1.Y23 ; U1.Y2 101.595,61.976 102.23,61.341 v1(102.235,61.341) ; U1.Y22 101.595,87.376 v1(102.23,88.011) v1@102.235,88.011 ; v1@102.23,86.741 102.235,86.741 102.235,86.736 102.86,86.111 U1.AA21 U1.AA21@102.865,86.106 ; v1(102.235,89.281) 102.235,89.276 102.86,88.651 U1.AA23 ; U1.AA13 102.865,75.946 v1(103.5,76.581) v1@103.505,76.581 ; U1.AA14 102.865,77.216 v1(103.5,77.851) v1@103.505,77.851 ; U1.AA15 102.865,78.486 v1(103.5,79.121) v1@103.505,79.121 ; U1.AA16 102.865,79.756 v1(103.5,80.391) v1@103.505,80.391 ; U1.AA17 102.865,81.026 v1(103.5,81.661) v1@103.505,81.661 ; U1.AA18 102.865,82.296 v1(103.5,82.931) v1@103.505,82.931 ; U1.AA19 102.865,83.566 103.5,84.201 v1(103.505,84.201) ; U1.AA20 102.865,84.836 103.5,85.471 v1(103.505,85.471) ; U1.AA22 102.865,87.376 103.5,88.011 v1(103.505,88.011) ; v1@103.5,86.741 v1(103.505,86.741) 103.505,86.746 104.13,87.371 U1.AB22 ; v1(103.505,89.281) 103.505,89.276 104.13,88.651 U1.AB23 ; v1(103.534,63.754) 103.578,63.754 104.086,63.246 U1.AB3 ; U1.AB2 104.135,61.976 104.77,62.611 v1(104.775,62.611) ; U1.AB4 104.135,64.516 v1(104.77,65.151) v1@104.775,65.151 ; U1.AB5 104.135,65.786 v1(104.77,66.421) v1@104.775,66.421 ; U1.AB6 104.135,67.056 v1(104.77,67.691) v1@104.775,67.691 ; U1.AB7 104.135,68.326 v1(104.77,68.961) v1@104.775,68.961 ; U1.AB8 104.135,69.596 v1(104.77,70.231) v1@104.775,70.231 ; U1.AB13 104.135,75.946 104.77,76.581 v1(104.775,76.581) ; U1.AB14 104.135,77.216 104.77,77.851 v1(104.775,77.851) ; U1.AB15 104.135,78.486 104.77,79.121 v1(104.775,79.121) ; U1.AB16 104.135,79.756 v1(104.643,80.264) ; U1.AB17 104.135,81.026 104.77,81.661 v1(104.775,81.661) ; U1.AB18 104.135,82.296 v1(104.77,82.931) v1@104.775,82.931 ; U1.AB19 104.135,83.566 v1(104.77,84.201) v1@104.775,84.201 ; U1.AB20 104.135,84.836 v1(104.77,85.471) v1@104.775,85.471 ; U1.AB21 104.135,86.106 v1(104.77,86.741) v1@104.775,86.741 ; v1(104.775,75.311) 104.775,75.316 105.4,75.941 U1.AC13 ; v1@104.775,88.011 v1(104.775,88.016) 105.4,88.641 U1.AC23 ; U1.AC15 105.405,78.486 106.04,79.121 v1(106.045,79.121) ; U1.AC18 105.405,82.296 v1(106.04,82.931) v1@106.045,82.931 ; U1.AC19 105.968,84.134 v1(106.335,84.134) ; U1.AC21 105.481,86.106 105.913,85.675 106.308,85.675 v1(106.375,85.608) ; U1.AC22 105.405,87.376 v1(106.04,86.741) v1@106.045,86.741
  L4 (Signal) w0.254: D3.3@87.056,37.719 v1(88.392,37.719)
  L4 (Signal) w0.4: v1(82.931,68.326) 82.979,68.278 84.064,68.278 C2.2
  other v1: 98.247,33.223 94.107,37.211 87.63,39.624 91.618,55.524 85.725,61.341 75.565,65.938 75.946,66.802 82.804,81.407 82.804,83.185 108.204,84.709 108.585,86.36 99.695,86.739 102.197,86.794 107.061,87.122 84.455,88.014 108.585,88.265 107.061,88.773 80.559,89.332 84.48,90.043 89.027,90.17 91.44,90.17 93.218,90.17 95.123,90.17 97.536,90.17 86.385,90.195 108.458,90.297 82.499,90.576 85.903,91.618 88.494,91.618 90.805,91.694 92.583,91.694 94.361,91.694 96.52,91.694 106.553,92.227 104.191,92.278 101.727,93.345 103.251,93.345 105.232,93.548 101.727,94.869 103.505,94.869
GPLED: U1.A14 U5.2 | length 40.2
  L1 (Signal) w0.2: U1.A14 76.835,76.591 76.835,75.692 77.216,75.311 80.264,75.311 80.645,74.93 80.645,59.131 81.255,58.522 v3(85.776,58.522) ; U5.2 87.868,49.082 88.925,50.14 v3(88.925,56.515)
  L4 (Signal) w0.2: v3(85.776,58.522) 86.919,58.522 v3(88.925,56.515)
GPLED2: U1.M3 U5.5 | length 21.1
  L1 (Signal) w0.2: U5.5 86.368,49.116 85.979,49.505 85.979,53.975 86.995,54.991 86.995,63.5 87.366,63.871 90.805,63.871 U1.M3
NetC1_2: C1.2 L1.2 L2.1 | length 4.4
  L1 (Signal) w0.21: L2.1 C1.2 L1.2
NetC5_1: C5.1 R5.1 R6.2 U4.5 | length 4.6
  L1 (Signal) w0.3: C5.1 94.797,52.468 95.957,52.468 R5.1 R6.2 97.27,52.401 U4.5@97.27,50.368
NetD1_1: D1.1 J5.1 L2.2 U1.V23 | length 20.3
  L1 (Signal) w0.21: J5.1 83.817,94.104 83.817,91.392 D1.1 83.815,91.264 84.147,90.932 98.755,90.932 99.06,90.627 99.06,88.656 U1.V23
NetD2_1: D2.1 R10.1 | length 1.5
  L1 (Signal) w0.3: D2.1@88.036,52.158 R10.1
NetD2_2: D2.2 U5.3 | length 3.1
  L1 (Signal) w0.2: U5.3 87.376,47.809 87.376,49.352 88.036,50.013 D2.2
NetD4_1: D4.1 R11.2 | length 1.5
  L1 (Signal) w0.3: D4.1 R11.2@84.988,53.533
NetD4_2: D4.2 U5.6 | length 3.2
  L1 (Signal) w0.2: D4.2 84.988,49.327 85.868,48.447 U5.6
NetJ1_A5: J1.A5 R1.1 | length 4.8
  L1 (Signal) w0.2: R1.1 86.779,34.467 88.761,36.449 89.154,36.449 89.674,36.969 J1.A5
NetJ1_B5: J1.B5 R2.1 | length 8.4
  L1 (Signal) w0.2: J1.B5 94.119,38.469 v1(94.615,37.973) ; R2.1 v1(96.177,33.998)
  L4 (Signal) w0.2: v1(94.615,37.973) 96.177,36.411 v1(96.177,33.998)
NetJ4_1: J4.1 L1.1 U1.AC20 | length 17.6
  L1 (Signal) w0.21: J4.1 103.632,94.107 107.823,89.916 107.823,85.598 107.061,84.836 U1.AC20
NetJ6_1: J6.1 U1.AC6 | length 23.2
  L1 (Signal) w0.2: J6.1@102.87,50.8 100.965,52.705 100.965,57.658 101.6,58.293 105.41,58.293 107.061,59.944 107.061,66.548 106.553,67.056 U1.AC6
NetJ7_1: J7.1 U1.AC7 | length 21.9
  L1 (Signal) w0.2: J7.1@102.86,53.657 101.473,55.045 101.473,57.404 101.854,57.785 105.664,57.785 107.569,59.69 107.569,67.818 107.061,68.326 U1.AC7
NetJ8_1: J8.1 U1.AC8 | length 18.9
  L1 (Signal) w0.2: J8.1 104.521,55.88 108.077,59.436 108.077,68.58 107.061,69.596 U1.AC8
NetL3_2: L3.2 U4.7 | length 4.4
  L1 (Signal) w0.3: L3.2 92.544,51.054 96.012,51.054 96.27,50.796 U4.7@96.27,50.368
NetR3_1: R3.1 U3.8 | length 3.5
  L1 (Signal) w0.3: U3.8@97.905,39.675 97.905,39.001 99.187,37.719 R3.1
NetR4_1: R4.1 U4.4 | length 3.3
  L1 (Signal) w0.3: U4.4@97.27,48.692 97.27,47.764 98.171,46.863 R4.1
NetR7_1: R7.1 U4.6 | length 6.5
  L1 (Signal) w0.3: R7.1 93.218,53.086 93.599,52.705 93.599,51.943 93.98,51.562 96.393,51.562 96.77,51.185 U4.6@96.77,50.368
NetR8_1: R8.1 U5.4 | length 2.8
  L1 (Signal) w0.2: R8.1 86.868,50.584 U5.4
NetR9_1: R9.1 U5.1 | length 1
  L1 (Signal) w0.2: U5.1 R9.1
NetU1_AC16: U1.AC16 U1.AC17 | length 1.3
  L1 (Signal) w0.3: U1.AC16 U1.AC17
NetU1_M23: U1.M23 U1.N23 | length 1.3
  L1 (Signal) w0.3: U1.M23 U1.N23
nRST: J2.7 U1.A11 | length 34.6
  L1 (Signal) w0.2: U1.A11 75.692,73.406 74.803,72.517 74.803,59.69 81.661,52.832 81.661,46.101 80.01,44.45 J2.7
RXD3: J3.5 U1.K1 | length 31.4
  L1 (Signal) w0.3: U1.K1 88.9,60.696 88.9,58.547 89.154,58.293 96.52,58.293 99.441,55.372 99.441,48.895 99.695,48.641 99.695,42.535 J3.5
TXD3: J3.6 U1.M1 | length 26.4
  L1 (Signal) w0.3: U1.M1 91.43,59.446 91.948,58.928 96.774,58.928 100.076,55.626 100.076,49.276 100.33,49.022 100.33,44.44 J3.6
USB_DEV_N: U1.A6 U2.2 | length 28.7
  L1 (Signal) w0.2: v1@76.581,66.118 U1.A6@77.46,66.997
  L1 (Signal) w0.381: v1(76.581,66.04) v1@76.581,66.118 ; U1.A6@77.46,66.997 U1.A6
  L4 (Signal) w0.2: v1(76.581,66.04) 76.581,61.671 83.718,54.534 83.722,54.534 84.049,54.207 84.049,42.378 84.156,42.271 84.156,41.94 U2.2
USB_DEV_P: U1.A5 U2.1 | length 28.3
  L1 (Signal) w0.2: v1(75.87,64.973) 76.647,64.973 77.455,65.781 77.46,65.781 U1.A5
  L4 (Signal) w0.2: v1(75.87,64.973) 75.87,61.849 76.216,61.502 76.219,61.5 76.219,61.496 83.68,54.035 83.684,54.035 U2.1
USB_DN: D3.2 J1.A7 J1.B7 U2.3 | length 10.6
  L1 (Signal) w0.2: v1@87.884,38.608 88.519,38.608 89.158,37.969 91.063,37.969 91.563,37.469 J1.B7
  L4 (Signal) w0.2: U2.3@84.201,40.437 84.201,40.655 U2.3 84.209,39.043 84.883,38.369 D3.2 85.298,38.354 86.487,38.354 86.741,38.608 v1(87.757,38.608)
USB_DP: D3.1 J1.A6 J1.B6 U2.4 | length 17.3
  L1 (Signal) w0.3: v1(87.757,36.83) 88.519,36.83 89.158,37.469 J1.A6 ; J1.B6 92.984,37.969 93.345,37.608 v1(93.345,37.592)
  L4 (Signal) w0.2: U2.4 83.684,38.268 84.883,37.069 D3.1 87.41,37.069 87.649,36.83 92.583,36.83 v1(93.345,37.592)
USB_VBUS_IN: J1.A4 J1.A9 J1.B4 J1.B9 U1.A8 U3.6 | length 53.9
  L1 (Signal) w0.3: v1(75.946,68.961) 76.016,68.961 76.617,69.563 77.427,69.563 U1.A8 ; J1.A4 J1.B9 94.381,36.469 95.822,37.91 ; J1.A9 J1.B4 94.615,38.969 ; v1(94.361,42.037) 94.361,41.942 94.615,41.688 94.615,38.969 ; U3.6@96.905,39.675 96.905,38.993 95.822,37.91 ; 94.615,38.969 94.762,38.969 95.822,37.91
  L4 (Signal) w0.3: v1(75.946,68.961) 76.708,68.199 77.343,68.199 79.375,66.167 79.375,63.373 86.233,56.515 86.233,50.165 v1(94.361,42.037)
pads on no net: J1.A8 J1.B8 J1.MH1 J1.MH2 J1.MH3 J1.MH4 J1.MH5 J1.MH6 J2.2 J2.3 J2.4 J2.5 J2.6 J2.8 J3.3 J3.4 J3.7 J3.8 U1.A2 U1.A9 U1.A10 U1.A12 U1.A13 U1.AA1 U1.AA2 U1.AA3 U1.AA4 U1.AA5 U1.AA6 U1.AA7 U1.AA8 U1.AA9 U1.AA10 U1.AA11 U1.AA12 U1.AB1 U1.AB9 U1.AB10 U1.AB11 U1.AB12 U1.AC1 U1.AC2 U1.AC5 U1.AC9 U1.AC10 U1.AC11 U1.AC12 U1.AC14 U1.B1 U1.B2 U1.B3 U1.B9 U1.B10 U1.B11 U1.B12 U1.B14 U1.B15 U1.B16 U1.B22 U1.B23 U1.C1 U1.C2 U1.C3 U1.C5 U1.C6 U1.C8 U1.C9 U1.C10 U1.C11 U1.C12 U1.C13 U1.C14 U1.C21 U1.C22 U1.D1 U1.D3 U1.E1 U1.E3 U1.F1 U1.F2 U1.F3 U1.G1 U1.G3 U1.G22 U1.H1 U1.H2 U1.H3 U1.J1 U1.J2 U1.J3 U1.K3 U1.L1 U1.L2 U1.L3 U1.M2 U1.N1 U1.N2 U1.N3 U1.R1 U1.R2 U1.T1 U1.T2 U1.T3 U1.U1 U1.U3 U1.V1 U1.V2 U1.V3 U1.W1 U1.W2 U1.W3 U1.Y1 U1.Y3 U5.8 U5.11

## Polygon pours and split planes (outlines as drawn)
GND on L1 (Signal) "GND_L01_P000" (solid, pour order 0): 78.74,25.4 101.6,25.4 104.14,27.94 104.14,53.975 109.22,59.055 109.22,90.297 101.6,97.917 81.28,97.917 73.66,90.297 73.66,59.055 78.74,53.975
GND on L4 (Signal) "GND_L04_P001" (solid, pour order 1): 78.74,25.4 78.74,53.975 73.66,59.055 73.66,90.297 81.28,97.917 101.6,97.917 109.22,90.297 109.22,59.055 104.14,53.975 104.14,27.94 104.013,27.94 101.473,25.4
GND on L2 (GND) "NONET_L-01_P-001" (solid, pour order 2): 78.74,25.4 78.74,54 73.66,59.08 73.66,90.297 81.28,97.917 101.6,97.917 109.22,90.297 109.22,59.08 104.13,53.99 104.13,27.94 101.59,25.4 78.73,25.4
GND on L3 (GND) "NONET_L-01_P-001" (solid, pour order 3): 78.73,25.4 78.73,53.99 78.74,54 73.66,59.08 73.66,90.297 81.28,97.917 101.6,97.917 109.22,90.297 109.22,59.08 104.14,54 104.14,27.95 101.59,25.4

## Other copper
L1 (Signal):
  rectangle net 3.3V: 76.962,81.788 80.772,85.344

## Silkscreen, mask and mechanical layers (free items; w line width, h text height)
Top Overlay:
  lines w0.254: 79.248,30.556 81.915,30.556 ; 79.248,33.02 81.915,33.02 ; 79.248,38.1 81.915,38.1 ; 79.248,40.64 81.915,40.64 ; 79.248,43.18 81.915,43.18 ; 79.248,45.72 81.915,45.72 ; 79.273,35.535 81.94,35.535 ; 100.965,33.02 103.632,33.02 ; 100.965,35.56 103.632,35.56 ; 100.965,38.1 103.632,38.1 ; 100.965,40.64 103.632,40.64 ; 100.965,43.18 103.632,43.18 ; 100.99,30.505 103.657,30.505 ; 101.015,45.735 103.682,45.735
  text "NC" at 81.292,47.498 h1.06 r270
  text "NC" at 101.588,46.355 h1.06 r90
  text "nRST" at 81.314,45.288 h0.78 r270
  text "NC" at 101.588,43.815 h1.06 r90
  text "NC" at 81.292,42.418 h1.06 r270
  text "TX" at 101.6,41.275 h1.06 r90
  text "NC" at 81.292,39.878 h1.06 r270
  text "RX" at 101.6,38.735 h1.06 r90
  text "NC" at 81.292,37.338 h1.06 r270
  text "NC" at 101.588,36.195 h1.06 r90
  text "NC" at 81.292,34.798 h1.06 r270
  text "NC" at 101.588,33.655 h1.06 r90
  text "NC" at 81.292,32.258 h1.06 r270
  text "5V" at 101.588,31.242 h1.06 r90
  text "GND" at 81.292,30.15 h1.06 r270
  text "MosaicBus" at 85.982,28.648 h3
  text "GND" at 101.537,28.067 h1.06 r90
Bottom Overlay:
  drawing of 50 lines, arcs and shapes, not listed
  text "septentrio" at 108.512,79.626 h3 r90
  text "open-source design by AG" at 74.75,65 h2 r270
  text "M" at 100.285,64.659 h2
  text "B" at 88.195,64.633 h2
  text "us" at 86.07,64.56 h2
  text "osaic" at 98.123,64.56 h2
  text "NC" at 83.16,46.646 h1.06
  text "NC" at 100.889,46.646 h1.06
  text "NC" at 100.889,44.106 h1.06
  text "nRST" at 84.201,44.081 h1.06
  text "NC" at 83.16,41.566 h1.06
  text "TX" at 100.889,41.554 h1.06
  text "NC" at 83.16,39.026 h1.06
  text "RX" at 100.889,39.014 h1.06
  text "NC" at 83.16,36.486 h1.06
  text "NC" at 100.889,36.486 h1.06
  text "NC" at 83.16,33.946 h1.06
  text "NC" at 100.889,33.946 h1.06
  text "NC" at 83.16,31.406 h1.06
  text "5V" at 100.889,31.406 h1.06
  text "GND" at 84.074,28.841 h1.06
  text "GND" at 100.813,28.815 h1.06
Mechanical 1:
  lines w0.254: 73.66,59.055 73.66,90.297 81.28,97.917 101.6,97.917 109.22,90.297 109.22,59.055 ; 73.66,59.08 78.74,54 78.74,25.4 ; 78.73,25.4 101.59,25.4 104.13,27.94 ; 104.14,27.94 104.14,54 109.22,59.08